# Altium PCB HVP012A.PcbDoc (part 2 of 3)
Units mil, origin at the board's own origin, x right, y up, seen from the top; angles counter-clockwise.
Board outline 2249 x 2178 mil, 4 copper layers (Top Layer, MidLayer1, MidLayer2, Bottom Layer), stack 61.2 mil thick; 91 components, 29 nets, 189 pads, 191 vias.
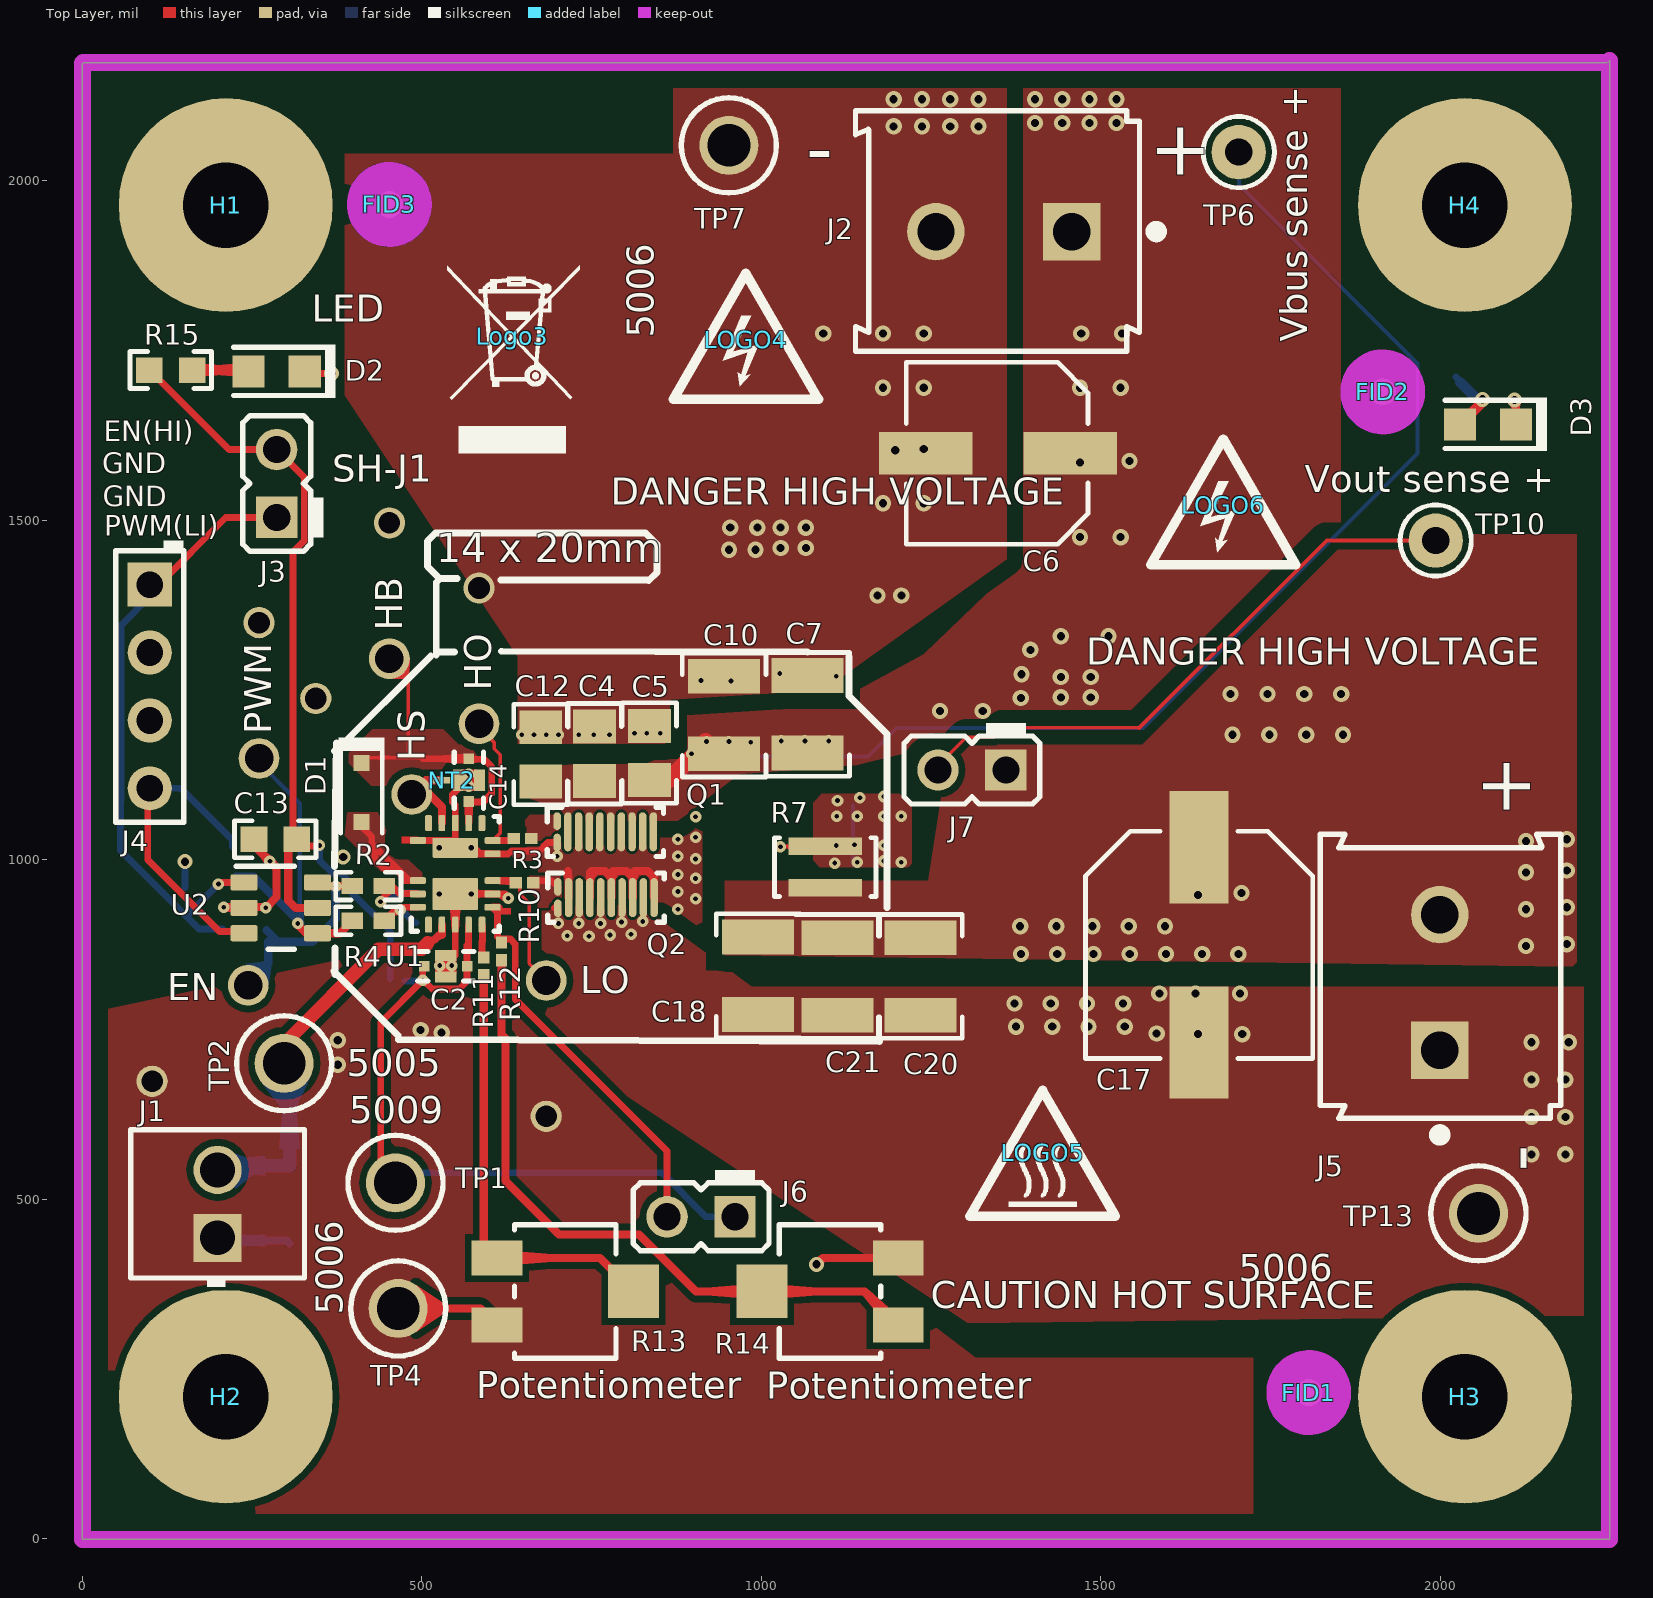
[diagram p0: Top Layer view]

## Via types
v1: diameter 24, hole 12, Top Layer to Bottom Layer, tented both sides, 110 vias
v2: diameter 17, hole 7, Top Layer to Bottom Layer, tented both sides, 71 vias
v3: diameter 22, hole 12, Top Layer to Bottom Layer, tented both sides, 6 vias
v4: diameter 19.68, hole 7.87, Top Layer to Bottom Layer, 4 vias

## Nets (pads, with @x,y where several pads share a name; then routed paths per layer and width w, separated by ;. In a path a pad name is that pad's centre, name@x,y a point inside that pad or via, vN(x,y) a via of type N, cw(c..) or ccw(c..) an arc to the next point about the centre after c; other vN are vias at no path point) (continued)
EN: (continued)
  Bottom Layer w12: TP8.1@244.21,816.64 273.62,846.06 273.62,879 288,879 ; R1.2@271,896 288,879 ; v2(373,961) 373,913 339,879 288,879
EN_IN: J3.1 J4.1 R1.1 R6.2 U2.1 | length 911
  Top Layer w10: J4.1@111,1404 211,1504 J3.1@286,1504 ; v2(200.19,964) 202.59,966.4 U2.1@237.87,966.4
  Bottom Layer w10: J4.1@101,1389.62 56.52,1345.14 56.52,1087.4 56,1086.88 56,1013.62 171.62,898 R1.1@206.38,898 ; R6.2@155,921 157.19,921 v2(200.19,964)
GND: C1.2 C2.3 C3.2 C4.2 C5.2 C6.2 C7.2 C10.2 C11.1 C12.2 C13.2 C15.1 C16.2 C17.2 C18.2 C19.2 C20.2 C21.2 D2.2 D3.2 J1.1 J2.2 J4.2 J4.3 J5.1 Q2.2 Q2.4 Q2.6 Q2.8 Q2.10 R6.1 R9.1 R13.3 R14.3 TP3.2 TP4.1 TP5.2 TP7.1 TP8.2 TP9.2 TP11.2 TP12.2 TP13.1 U1.3 U1.7 U1.20@549,949.47 U2.2 | length 849.5
  Top Layer w10: D2.2@335,1716 v3(367,1716) ; C2.3@548.89,858.71 U1.20@548.89,949.89 ; U1.20@572.52,949.89 U1.7@604.01,949.89 ; U1.7@604.12,949.47 623.07,949.47 627,945.54 v2(627,943) ; Q2.2@695,929 699.35,929 Q2.2@700.13,928.21
  Top Layer w12: v2(208,930) v2@213,930 ; U2.2@237.87,929 214,929 v2@213,930 ; C13.2@253.5,1020 v2(276,997.5) 286,987.5 286,945 v2(270,929) 269,930 v2@213,930 ; TP4.1@451,339 TP4.1@465,339 586.39,339 R13.3@610.61,314.79 ; v3(1081,404) 1090.21,413.21 R14.3@1201.39,413.21 ; v3(2109,1677) 2111.34,1674.66 D3.2@2111.34,1641
  Bottom Layer w10: R6.1@151,959 151,984
  Bottom Layer w12: J1.1@199,439 300.91,439 C11.1@305,434.91
  other v1: 2134,566 2184,566 2134,621 2184,621 2134,676 2184,676 376,698 2134,731 2189,731 376,734 1642.67,743 1708,743 1582,744 529,745 498,749 1375,754 1428.33,754 1481.67,754 1535,754 1372.67,788 1426,788 1479.33,788 1532.67,788 1586,803 1639.33,803 1704.67,803 1171,1389 1206,1389 952.1,1456.48 991.14,1456.48 1028.29,1459 1065.43,1459 954,1489 994,1489 1028.29,1489 1065.43,1489 1179,1525 1239,1525 1197,1603 1239,1605 1179,1695 1239,1695 1091,1775 1179,1775 1239,1775 1194.67,2080 1236.33,2080 1278,2080 1319.67,2080 1194.67,2120 1236.33,2120 1278,2120 1319.67,2120
  other v2: 526,844 544,844 746,887 714,888 777,889 808,890 701,906 731,906 763,906 794,908 825,909 647,1184 665,1184 683,1184 701,1184 731,1184 753,1184 776,1184 813,1186 831,1186 851,1186 955,1263 911,1264 1110,1270 1027,1274
  other v3: 151,997 384,1004
  other v4: 525.38,949.47 572.62,949.47
HB2: C14.1 C14.2 D1.1 TP3.1 U1.12 | length 457.1
  Top Layer w5: D1.1@410,1150.2 479.65,1150.2 ; TP3.1@452,1296 479.65,1268.35 479.65,1150.2 ; 501.71,1148.5 500.01,1150.2 479.65,1150.2
  Top Layer w10: 501.71,1148.5 C14.2@569,1148.5 ; U1.12@568.68,1053.8 C14.1@568.68,1085.19 ; C14.1@568.87,1085 590.51,1085 602.62,1097.11 602.62,1136.89 591.51,1148 578,1148 578,1147
HGATE: Q1.1 R3.2
HO: R3.1 TP5.1 U1.10 | length 211.8
  Top Layer w5: TP5.1@567,1196 TP5.1@567,1200 ; TP5.1@590,1189 606.5,1172.5 606.5,1163.3 615.12,1154.67 615.12,1039.22 U1.10@604.12,1028.21
  Top Layer w10: U1.10@604.12,1028.21 632.22,1028.21 R3.1@635.01,1031